# EAGLE board Bozman Arduino-Pro-Mini-KeyPad interface V16.7 BOARD (EAGLE 5.09)
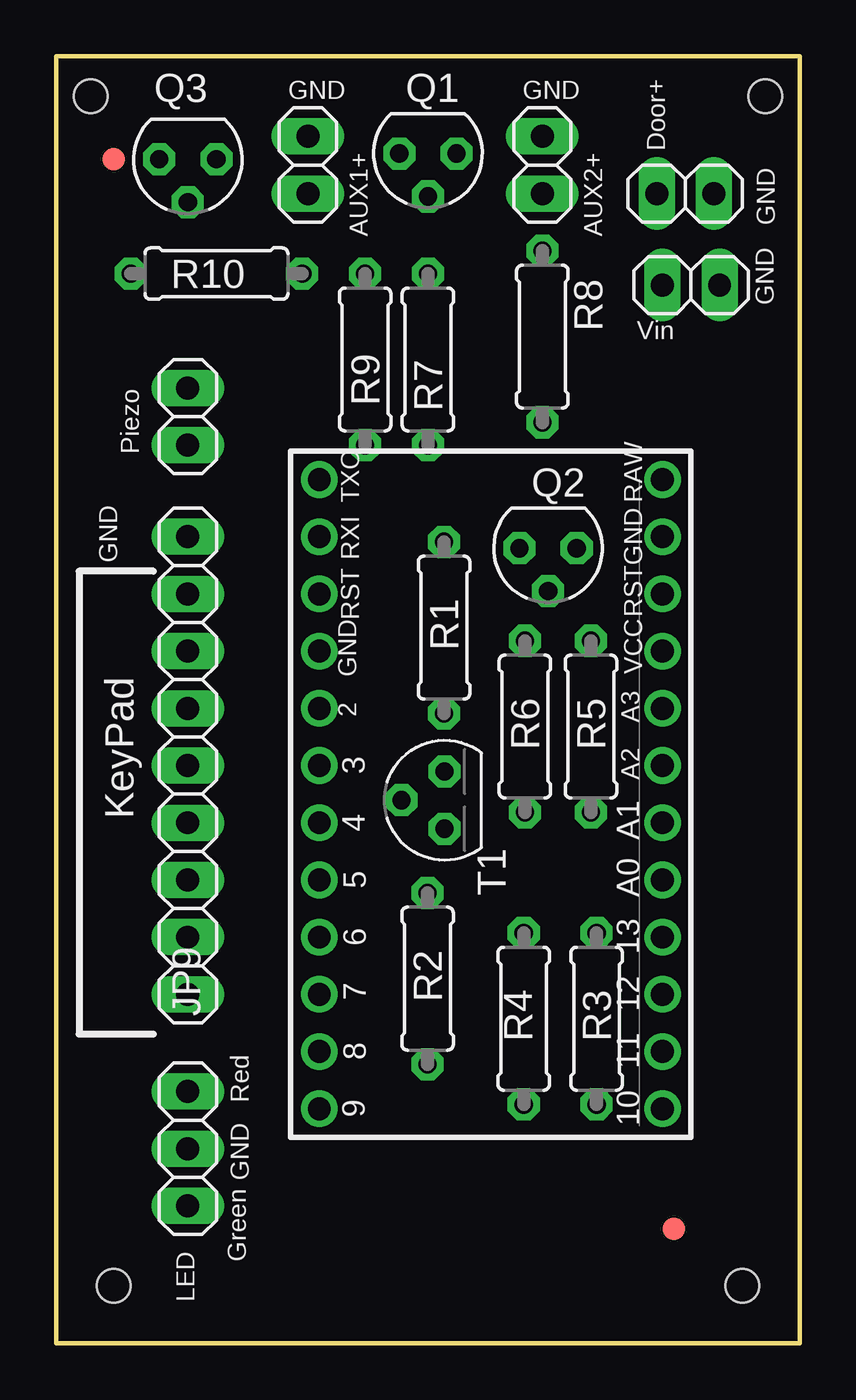
[diagram p0: board, top side]
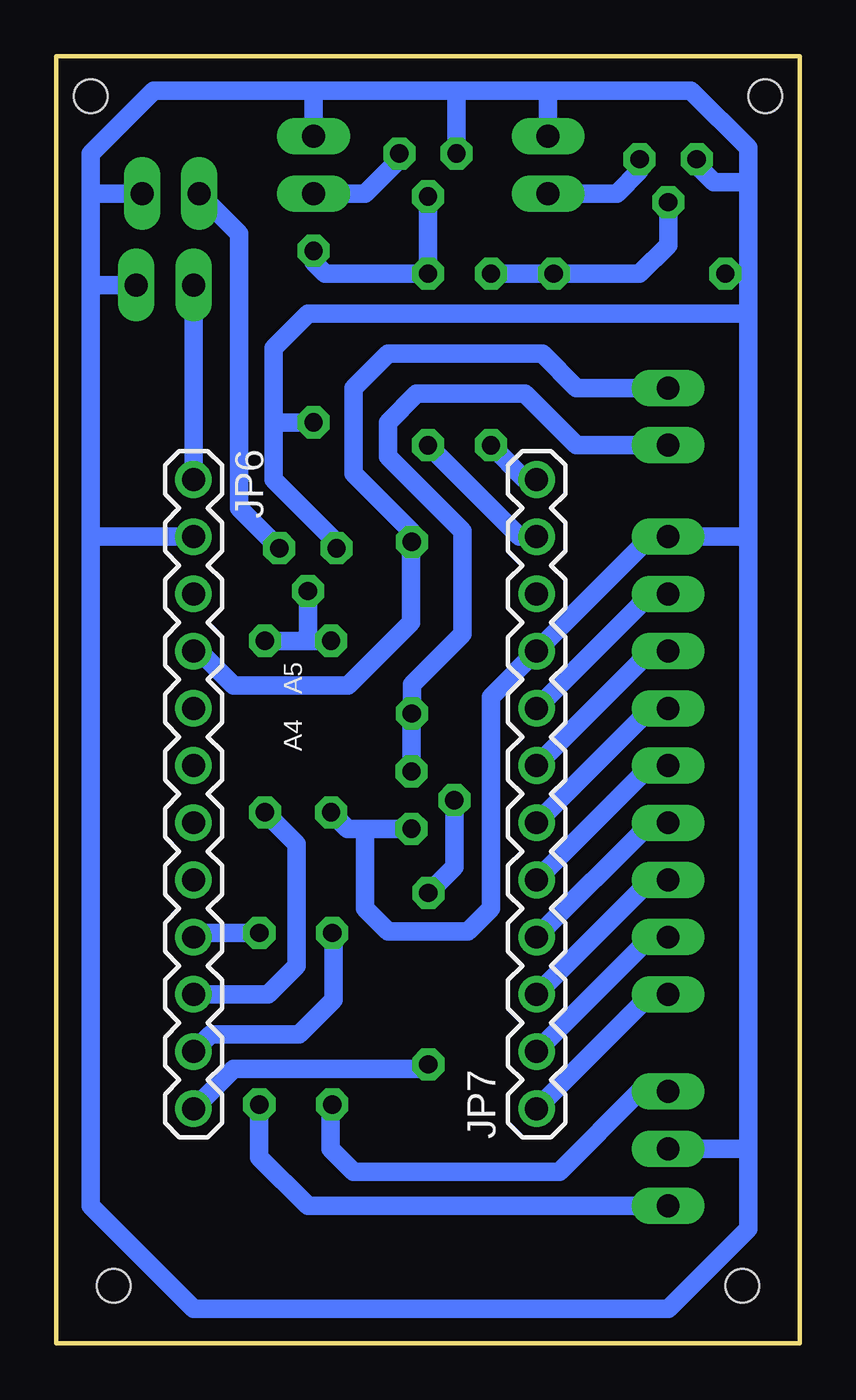
[diagram p1: board, bottom side, seen from below]

Size 33.02 x 57.15 mm. Coordinates in mm from the lower left corner, seen from the top.
Outline: 0,57.15 0,0 33.02,0 33.02,57.15 0,57.15
Copper layers (1*16): Top 0.035mm / dielectric 1.5mm / Bottom 0.035mm
Design rules "SparkFun *": minimum track width 8mil, minimum drill 20mil, track to track 8mil, track to pad 8mil, pad to pad 8mil, via to via 8mil, smd to smd 8mil, copper to edge 10mil, drill to drill 8mil, minimum pad ring 12mil, minimum via ring 10mil, stop-mask expansion 4mil, vias tented up to drill 20mil, thermal gap 10mil
Net classes: 0 default: width 0.203 mm; 1 vcc: width 0.254 mm
Holes 1.5 mm at 2.54,2.54 30.48,2.54 31.5,55.37 1.52,55.37

## Footprints (pad centres in the part's own frame; a part is rotated, then mirrored left to right if it is on the bottom)
1X02 = drill 1.016 long: 1 -1.27,0; 2 1.27,0
1X09 = drill 1.016 long: 1 -10.16,0; 2 -7.62,0; 3 -5.08,0; 4 -2.54,0; 5 0,0; 6 2.54,0; 7 5.08,0; 8 7.62,0; 9 10.16,0
1X12 = drill 1.016 round: 1 0,0; 2 2.54,0; 3 5.08,0; 4 7.62,0; 5 10.16,0; 6 12.7,0; 7 15.24,0; 8 17.78,0; 9 20.32,0; 10 22.86,0; 11 25.4,0; 12 27.94,0
1X03 = drill 1.016 long: 1 -2.54,0; 2 0,0; 3 2.54,0
SOT54E = drill 0.813 octagon: D -1.27,0; G 0,1.905; S 1.27,0
0207/7 = drill 0.813 octagon: 1 -3.81,0; 2 3.81,0
TO92 = drill 0.813 octagon: 1 1.27,0; 2 0,1.905; 3 -1.27,0
FIDUCIAL-1X2 = smd 1 x 1: 1 0,0

## Placement (x,y rotation side)
JP1  [1X02]  21.59,52.32 90 top
JP2  [1X02]  11.18,52.32 90 top
JP3  [1X09]  5.84,25.65 90 top
JP4  [1X02]  28.19,46.99 180 top
JP5  [1X02]  5.84,41.15 90 top
JP6  [1X12]  26.92,38.35 270 bottom
JP7  [1X12]  11.68,10.41 90 bottom
JP8  [1X02]  27.94,51.05 0 top
JP9  [1X03]  5.84,8.64 270 top
Q1  BS170  [SOT54E]  16.51,52.83 180 top
Q2  BS170  [SOT54E]  21.84,35.31 180 top
Q3  BS170  [SOT54E]  5.84,52.58 180 top
R1  1k  [0207/7]  17.22,31.78 90 top
R2  1k  [0207/7]  16.49,16.19 270 top
R3  150  [0207/7]  24,14.41 90 top
R4  150  [0207/7]  20.76,14.41 90 top
R5  1k  [0207/7]  23.75,27.38 270 top
R6  1meg  [0207/7]  20.81,27.38 270 top
R7  1k  [0207/7]  16.51,43.69 270 top
R8  1meg  [0207/7]  21.59,44.7 270 top
R9  1k  [0207/7]  13.72,43.69 270 top
R10  1meg  [0207/7]  7.11,47.5 180 top
T1  2N3904  [TO92]  17.24,24.12 90 top
U$2  FIDUCIAL1X2  [FIDUCIAL-1X2]  27.43,5.08 0 top
U$4  FIDUCIAL1X2  [FIDUCIAL-1X2]  2.54,52.58 0 top

## Library data of the parts
JP1-JP4 JP8 = pinhead
JP5 = pinhead; FUNCTION: Piezo
JP6 JP7 U$2 U$4 = SparkFun
JP9 = pinhead; FUNCTION: Red/Green LED
Q1-Q3 = transistor-small-signal
R1-R10 = rcl
T1 = transistor-neu-to92

## Nets
D02: JP3.8 JP7.8
D03: JP3.7 JP7.7
D04: JP3.6 JP7.6
D05: JP3.5 JP7.5
D06: JP3.4 JP7.4
D07: JP3.3 JP7.3
D08: JP3.2 JP7.2
D09: JP3.1 JP7.1
D10: JP6.12 R2.2
D11: JP6.11 R4.2
D12: JP6.10 R5.2
D13: JP6.9 R3.2
GND [vcc]: JP1.2 JP2.2 JP3.9 JP4.1 JP6.2 JP7.9 JP8.2 JP9.2 Q1.S Q2.S Q3.S R6.2 R8.2 R10.2 T1.3
JP2POS: JP2.1 Q3.D
N$1: Q1.G R7.1 R8.1
N$2: JP8.1 Q2.D
N$3: JP1.1 Q1.D
N$4: Q3.G R9.1 R10.1
N$10: R2.1 T1.2
N$11: JP5.1 R1.1 T1.1
N$13: JP9.3 R3.1
N$15: JP9.1 R4.1
N$19: Q2.G R5.1 R6.1
RXI: JP7.11 R7.2
TX0: JP7.12 R9.2
VCC: JP5.2 JP6.4 R1.2
VIN: JP4.2 JP6.1

## Tracks (layer width: path | path; a pad name or v marks a point on that pad's centre or on a via)
D02
  Bottom 0.813: JP3.8 6.6,33.27 JP7.8
D03
  Bottom 0.813: JP3.7 6.6,30.73 JP7.7
D04
  Bottom 0.813: JP3.6 6.6,28.19 JP7.6
D05
  Bottom 0.813: JP3.5 6.6,25.65 JP7.5
D06
  Bottom 0.813: JP3.4 6.6,23.11 JP7.4
D07
  Bottom 0.813: JP3.3 6.6,20.57 JP7.3
D08
  Bottom 0.813: JP3.2 6.6,18.03 JP7.2
D09
  Bottom 0.813: JP3.1 6.6,15.49 JP7.1
D10
  Bottom 0.813: JP6.12 25.15,12.19 16.68,12.19 R2.2
D11
  Bottom 0.813: R4.2 20.7,18.16 20.7,15.24 22.23,13.72 26.16,13.72 JP6.11
D12
  Bottom 0.813: JP6.10 23.62,15.49 22.35,16.76 22.35,22.18 R5.2
D13
  Bottom 0.813: R3.2 26.74,18.22 JP6.9
GND
  Bottom 0.813: 26.76,35.65 JP6.2 31.24,35.81 31.5,36.07 | 2.29,8.64 2.29,5.08 5.84,1.52 26.92,1.52 31.5,6.1 31.5,36.07 | 2.29,8.64 JP9.2 | 19.3,22.85 T1.3 | 19.3,22.85 20.09,22.85 R6.2 | 19.3,22.85 19.3,19.3 18.29,18.29 14.73,18.29 13.72,19.3 13.72,28.7 JP7.9 6.6,35.81 JP3.9 2.54,35.81 2.29,35.56 | 2.29,8.64 2.29,35.56 | 2.29,35.56 2.29,45.72 | 2.29,45.72 2.29,47.5 | 2.29,47.5 2.29,51.56 | 2.29,51.56 2.29,53.09 4.83,55.63 11.18,55.63 | 11.18,55.63 15.24,55.63 | 21.59,55.63 28.7,55.63 31.5,52.83 31.5,51.05 | 21.59,55.63 15.24,55.63 | 31.5,36.07 31.5,46.99 | 31.5,46.99 31.5,51.05 | Q2.S 20.57,35.56 23.37,38.35 23.37,41.15 | R8.2 23.11,40.89 23.37,41.15 | 2.29,47.5 R10.2 | 23.37,41.15 23.37,44.2 21.84,45.72 2.29,45.72 | Q3.S 4.57,52.32 3.81,51.56 2.29,51.56 | 31.5,51.05 JP8.2 | 31.5,46.99 JP4.1 | 11.18,55.63 JP2.2 | 15.24,55.63 Q1.S | 21.59,55.63 JP1.2
JP2POS
  Bottom 0.813: Q3.D 7.11,52.07 8.13,51.05 JP2.1
N$1
  Bottom 0.813: R8.1 21.59,48.01 21.08,47.5 R7.1 Q1.G
N$2
  Bottom 0.813: Q2.D 24.89,37.08 24.89,49.28 JP8.1
N$3
  Bottom 0.813: Q1.D 17.78,52.58 19.3,51.05 JP1.1
N$4
  Bottom 0.813: R9.1 R10.1 7.11,47.5 5.84,48.77 Q3.G
N$10
  Bottom 0.813: T1.2 15.34,21.15 R2.1
N$11
  Bottom 0.813: T1.1 17.24,27.95 R1.1 17.22,29.26 14.99,31.5 14.99,36.07 18.29,39.37 18.29,40.89 17.02,42.16 12.19,42.16 9.91,39.88 JP5.1
N$13
  Bottom 0.813: JP9.3 21.84,6.1 24,8.26 R3.1
N$15
  Bottom 0.813: JP9.1 7.11,11.18 10.67,7.62 19.81,7.62 20.83,8.64 20.83,10.54 R4.1
N$19
  Bottom 0.813: R6.1 22.1,31.19 | 22.1,31.19 R5.1 | Q2.G 21.84,31.45 22.1,31.19
RXI
  Bottom 0.813: JP7.11 12.45,35.81 R7.2
TX0
  Bottom 0.813: JP7.12 12.19,38.35 R9.2
VCC
  Bottom 0.813: JP6.4 26.67,30.73 25.15,29.21 20.07,29.21 17.27,32 17.27,35.54 R1.2 17.22,36.02 19.81,38.61 19.81,42.42 18.29,43.94 11.43,43.94 9.91,42.42 JP5.2
VIN
  Bottom 0.813: JP6.1 JP4.2

## Text on the board
tPlace: GND | GND | Door+ | GND | AUX1+ | AUX2+ | GND | Vin | Piezo | GND | TXO | RAW | RXI | GND | RST | RST | KeyPad | GND | VCC | 2 | A3 | 3 | A2 | 4 | A1 | 5 | A0 | 6 | 13 | 7 | 12 | Red | 8 | 11 | GND | 9 | 10 | Green | LED
bPlace: A5 | A4